# Altium PCB TK101_Tonegenerator_Hovedkort.PcbDoc
Units mm, origin at the board's own origin, x right, y up, seen from the top; angles counter-clockwise.
Board outline 70 x 50 mm, 2 copper layers (Top Layer, Bottom Layer); 54 components, 36 nets, 165 pads, 208 vias.
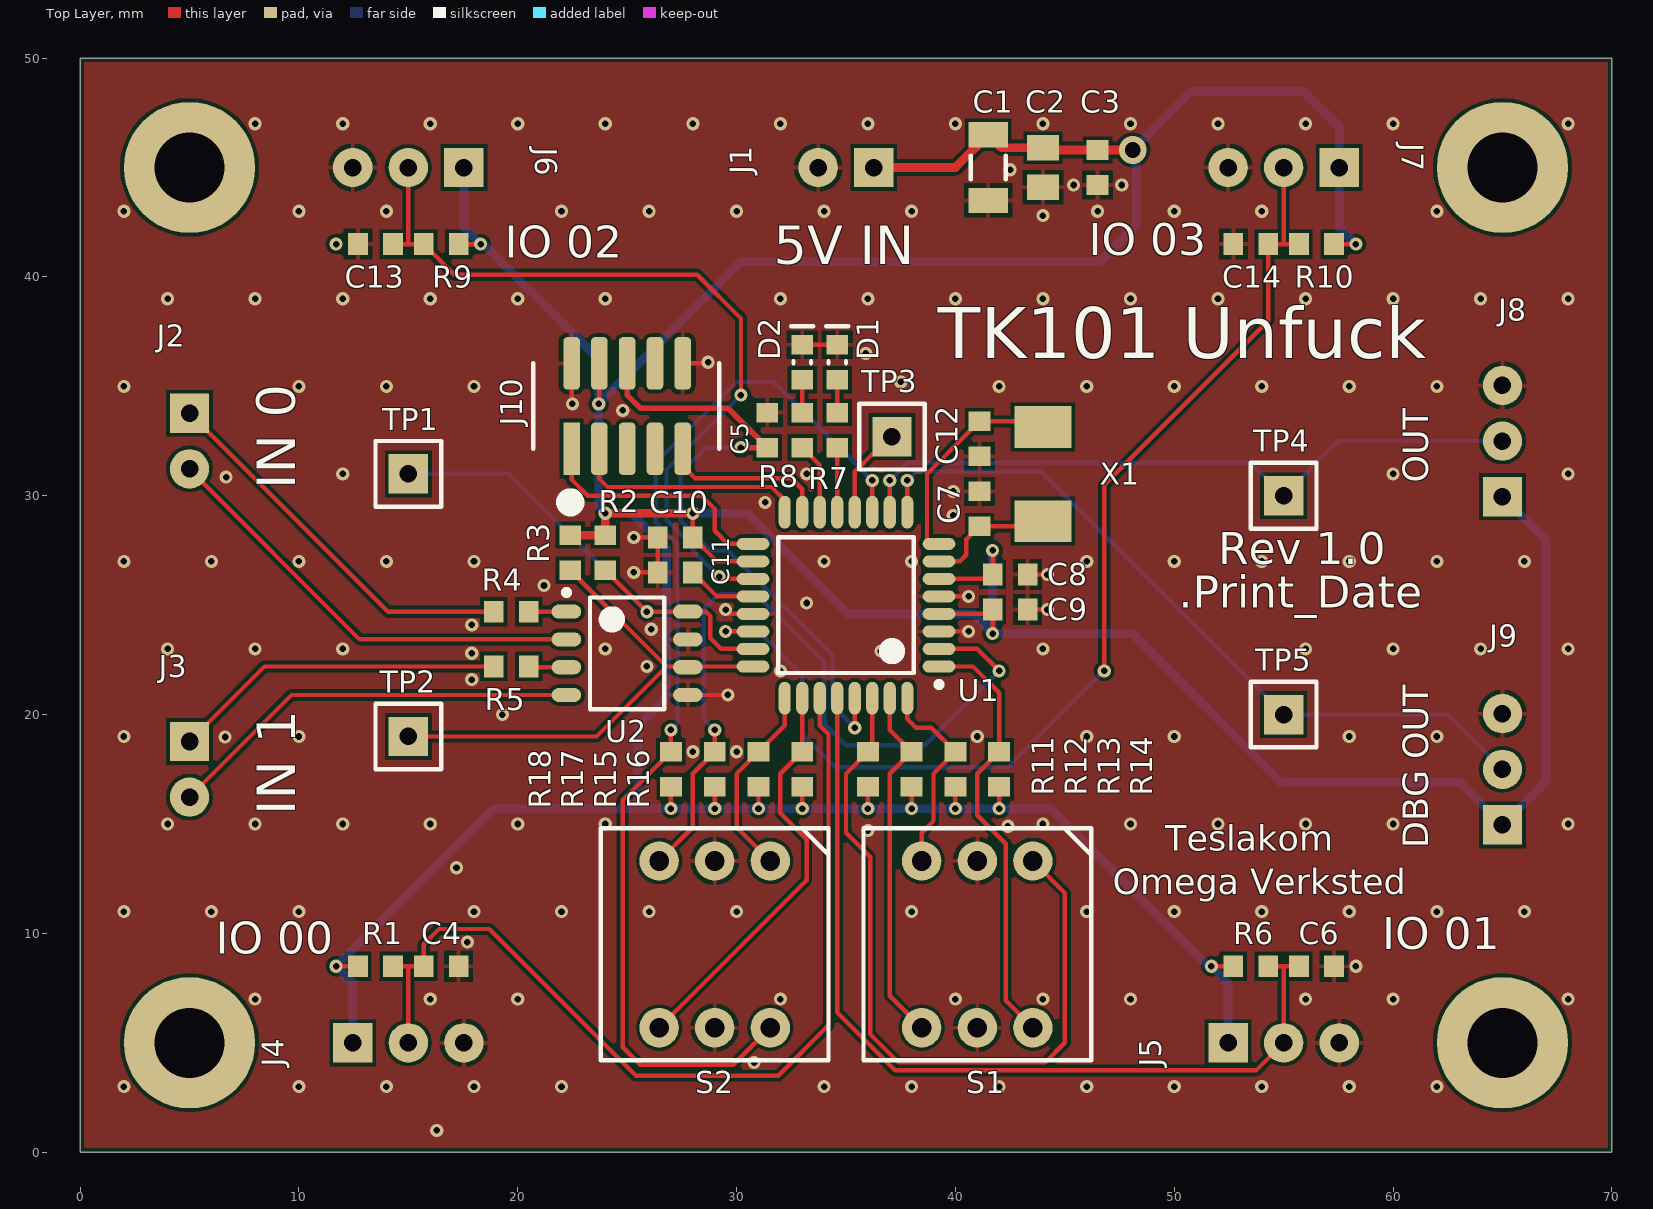
[diagram p0: Top Layer view]
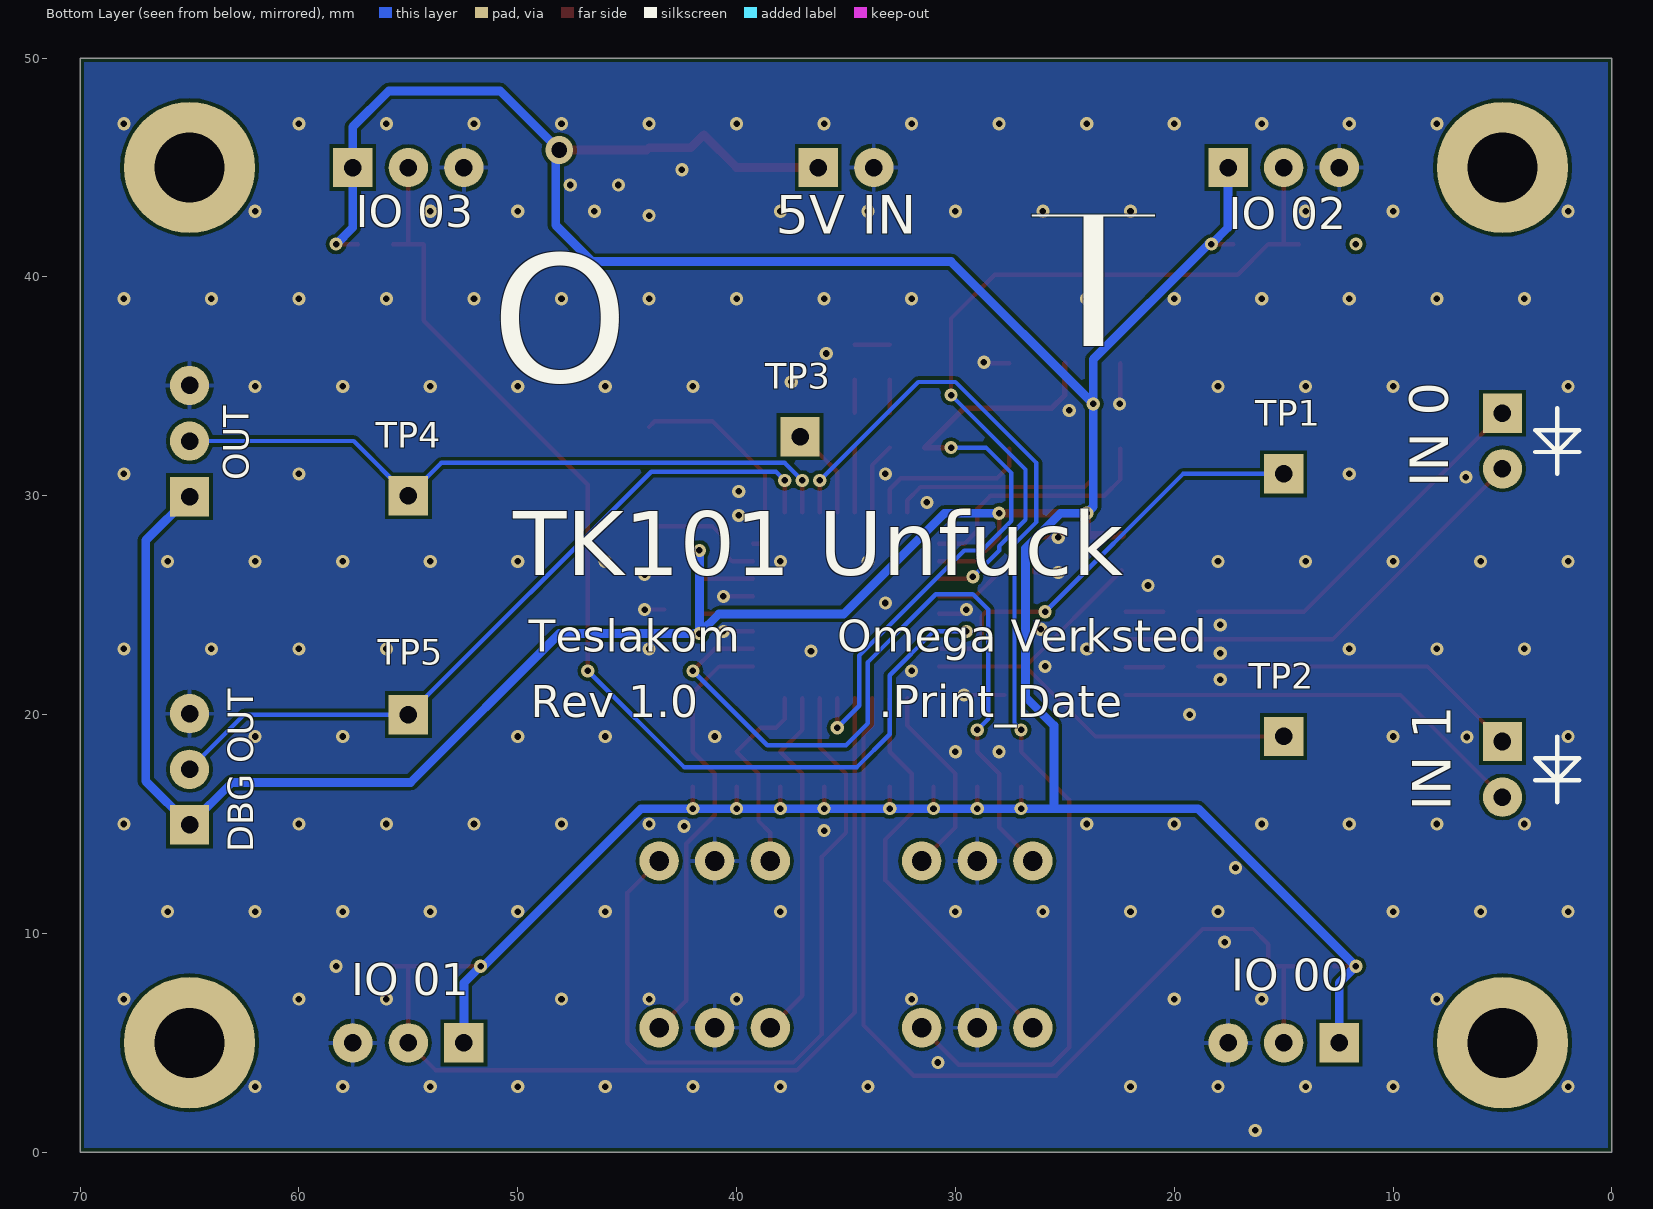
[diagram p1: Bottom Layer view, seen from below]

## Layer stack, top to bottom
Top Solder: solder mask 0.0102, Solder Resist, Dk 3.5
Top Layer: signal copper 0.0356
Dielectric 1: dielectric 0.32, FR-4, Dk 4.8
Bottom Layer: signal copper 0.0356
Bottom Solder: solder mask 0.0102, Solder Resist, Dk 3.5

## Board outline
0,0 0,50 70,50 70,0

## Design rules (kind name [scope] priority, off if disabled: settings)
Clearance [All] p1: gap=0.16 except(0: Arc-Text Track-Text SMDPad-Text THPad-Text Via-Text Fill-Text Poly-Text Region-Text Text-Text)
Height [All] p1: minheight=0 maxheight=200 prefheight=12.7
HoleSize [All] p1: absolutevalues=TRUE maxlimit=6.35 minlimit=0.3 maxpercent=80.000 minpercent=20.000
MinimumSolderMaskSliver [All] p1: minsoldermaskwidth=0.1
PlaneClearance [All] p1: clearance=1
PlaneConnect [All] p1: planeconnectstyle=Relief reliefexpansion=0.508 reliefentries=4 reliefconductorwidth=1 reliefairgap=0.254
PolygonConnect PolygonConnect_1 [IsVia] p1: connectstyle=Direct reliefconductorwidth=0.254 reliefentries=4 polygonreliefangle="90 Angle" airgapwidth=0.254
PolygonConnect [All] p2: connectstyle=Relief reliefconductorwidth=0.2 reliefentries=4 polygonreliefangle="90 Angle" airgapwidth=0.2
RoutingVias [All] p1: holewidth=0.3 width=0.6 viastyle="Through Hole" minholewidth=0.3 minwidth=0.6 maxholewidth=6.35 maxwidth=10
SilkToSolderMaskClearance [IsPad] p1: minsilkscreentomaskgap=0.178 clearancetoexposedcopper=TRUE
SolderMaskExpansion [All] p1: expansion=0.1
Width [All] p1: maxlimit=10 minlimit=0.16 preferedwidth=0.4
24 further rules are at their usual default settings.

## Components (designator, comment, footprint, x,y, rotation, side; value= is the part's Value field where it differs from the comment)
C1 "4.7uF" CAPC1206(3216)170_N 41.5,45 r90 top
C2 "1uF" CAPC0805(2012)100_N 44,45 r90 top
C3 "100nF" CAPC0603(1608)55_N 46.5,45 r90 top
C4 "100nF" CAPC0603(1608)55_N 16.5,8.5 r180 top
C5 "100nF" CAPC0603(1608)55_N 31.4,33 r270 top
C6 "100nF" CAPC0603(1608)55_N 56.5,8.5 r180 top
C7 "8.2pF" CAPC0603(1608)55_N 41.1,29.4 r270 top
C8 "100nF" CAPC0603(1608)55_N 42.5,26.4 r0 top
C9 "100nF" CAPC0603(1608)55_N 42.5,24.8 r0 top
C10 "100nF" CAPC0603(1608)55_N 27.2,28.1 r0 top
C11 "100nF" CAPC0603(1608)55_N 27.2,26.5 r0 top
C12 "8.2pF" CAPC0603(1608)55_N 41.1,32.6 r90 top
C13 "100nF" CAPC0603(1608)55_N 13.5,41.5 r0 top
C14 "100nF" CAPC0603(1608)55_N 53.5,41.5 r0 top
D1 "SMD LED Red" I_LEDC0603(1608)_N 34.6,36.1 r90 top
D2 "SMD LED Red" I_LEDC0603(1608)_N 33,36.1 r90 top
J1 "JST 2pin" JST_2P 35,45 r90 top
J2 "JST 2pin" JST_2P 5,32.5 r180 top
J3 "JST 2pin" JST_2P 5,17.5 r180 top
J4 "JST 3pin" JST_3P 15,5 r270 top
J5 "JST 3pin" JST_3P 55,5 r270 top
J6 "JST 3pin" JST_3P 15,45 r90 top
J7 "JST 3pin" JST_3P 55,45 r90 top
J8 "JST 3pin" JST_3P 65,32.5 r0 top
J9 "JST 3pin" JST_3P 65,17.5 r0 top
J10 "Header SMD 127 2x5" SMDHDRV10P127_2X5_615X330X560B 25,34.1 r90 top
R1 "10k" RESC0603(1608)_N 13.5,8.5 r180 top
R2 "10k" RESC0603(1608)_N 24,27.4 r90 top
R3 "10k" RESC0603(1608)_N 22.4,27.4 r90 top
R4 "330R" RESC0603(1608)_N 19.7,24.7 r0 top
R5 "330R" RESC0603(1608)_N 19.7,22.2 r0 top
R6 "10k" RESC0603(1608)_N 53.5,8.5 r180 top
R7 "330R" RESC0603(1608)_N 34.6,33 r270 top
R8 "330R" RESC0603(1608)_N 33,33 r270 top
R9 "10k" RESC0603(1608)_N 16.5,41.5 r0 top
R10 "10k" RESC0603(1608)_N 56.5,41.5 r0 top
R11 "10k" RESC0603(1608)_N 36,17.5 r270 top
R12 "10k" RESC0603(1608)_N 38,17.5 r270 top
R13 "10k" RESC0603(1608)_N 40,17.5 r270 top
R14 "10k" RESC0603(1608)_N 42,17.5 r270 top
R15 "10k" RESC0603(1608)_N 31,17.5 r270 top
R16 "10k" RESC0603(1608)_N 33,17.5 r270 top
R17 "10k" RESC0603(1608)_N 29,17.5 r270 top
R18 "10k" RESC0603(1608)_N 27,17.5 r270 top
S1 "MCRS3AF-16R-V-B" MCRS3AF-16R-V-B 41,9.5 r180 top
S2 "MCRS3AF-16R-V-B" MCRS3AF-16R-V-B 29,9.5 r180 top
TP1 "Header1x1" HDRV1W64P254_1X1_254X254X900B 15,31 r0 top
TP2 "Header1x1" HDRV1W64P254_1X1_254X254X900B 15,19 r0 top
TP3 "Header1x1" HDRV1W64P254_1X1_254X254X900B 37.1,32.7 r0 top
TP4 "Header1x1" HDRV1W64P254_1X1_254X254X900B 55,30 r0 top
TP5 "Header1x1" HDRV1W64P254_1X1_254X254X900B 55,20 r0 top
U1 "ATMEGA168V-10AI" TQFP80P900X900X120-32N 35,25 r180 top
U2 "Dual_Optocoupler" SOIC127P590X363-8N 25,22.8 r0 top
X1 "NX5032GA-16" CRYSTAL-ABM7 44,31 r90 top

## Footprints (in the part's own frame and the unit in brackets; to place one, negate y for a bottom-side part, rotate by r counter-clockwise, add the part's x,y. Pads: shape width x height; smd on the part's side, far side on the other; paste and mask are expansions set on the pad)
CAPC0603(1608)55_N [mm] "Chip Capacitor, Body 1.6x0.8mm, Height 0.55mm, IPC Medium Density"
  rect 0.9x1 smd: 1(-0.8,0) 2(0.8,0)
  body extent -0.87,-0.48 0.88,0.47, height 0.55
CAPC0805(2012)100_N [mm] "Chip Capacitor, Body 2.0x1.2mm, Height 1.0mm, IPC Medium Density"
  rect 1.15x1.45 smd: 1(-0.9,0) 2(0.9,0)
  body extent -1.1,-0.72 1.1,0.73, height 1
CAPC1206(3216)170_N [mm] "Chip Capacitor, Body 3.2x1.6mm, Height 1.7mm, IPC Medium Density"
  rect 1.15x1.8 smd: 1(-1.5,0) 2(1.5,0)
  silkscreen extent -0.55,-0.8 0.55,0.8, body extent -1.7,-0.9 1.7,0.9, height 1.7
CRYSTAL-ABM7 [mm]
  rect 1.9x2.6 smd: 1(-2.159,0) 2(2.141,0)
  body extent -3.05,-1.75 3.05,1.75, height 1.44
HDRV1W64P254_1X1_254X254X900B [mm] "Header 1x1"
  rect 1.8x1.8 hole 0.8: 1(0,0)
  silkscreen extent -1.5,-1.5 1.5,1.5
I_LEDC0603(1608)_N [mm] "Chip Resistor, Body 1.6x0.8mm, IPC Medium Density"
  rect 0.9x1 smd: 1(-0.8,0) 2(0.8,0)
  silkscreen extent -0.05,-0.51 1.65,0.51, body extent -0.85,-0.45 0.85,0.45, height 0.9
JST_2P [mm]
  rect 1.8x1.8 hole 0.8: 1(0,-1.27)
  round 1.8 hole 0.8: 2(0,1.27)
  body extent -2.4,-3.7 3.35,3.7, height 7
JST_3P [mm]
  rect 1.8x1.8 hole 0.8: 1(0,-2.54)
  round 1.8 hole 0.8: 2(0,0) 3(0,2.54)
  body extent -2.35,-4.95 3.4,4.95, height 7
MCRS3AF-16R-V-B [mm] "Rotary hex encoder"
  round 1.8 hole 0.9: 1(-2.54,-3.81) 2(2.54,3.81) 4(2.54,-3.81) 8(-2.54,3.81) C(0,3.81) C(0,-3.81)
  silkscreen extent -5.2,-5.3 5.2,5.3, body extent -4.9,-4.95 4.9,4.95, height 4.5
RESC0603(1608)_N [mm] "Chip Resistor, Body 1.6x0.8mm, IPC Medium Density"
  rect 0.9x1 smd: 1(-0.8,0) 2(0.8,0)
  body extent -0.85,-0.47 0.85,0.47, height 0.6
SMDHDRV10P127_2X5_615X330X560B [mm] "SMD 2X5 Vertical Header"
  rect 2.4x0.76 smd: 1(-1.95,2.54)
  rrect50% 2.4x0.76 smd: 2(1.95,2.54) 3(-1.95,1.27) 4(1.95,1.27) 5(-1.95,0) 6(1.95,0) 7(-1.95,-1.27) 8(1.95,-1.27) 9(-1.95,-2.54) 10(1.95,-2.54)
  silkscreen extent -4.54,-4.21 1.95,4.29, body extent -2.7,-3.18 2.8,3.17, height 4.5
SOIC127P590X363-8N [mm] "SOIC, 8-Leads, Body 4,88x3,91mm, Pitch 1,27mm, IPC Medium Density"
  oval 1.35x0.65 smd: 1(-2.775,1.905) 2(-2.775,0.635) 3(-2.775,-0.635) 4(-2.775,-1.905) 5(2.775,-1.905) 6(2.775,-0.635) 7(2.775,0.635) 8(2.775,1.905)
  silkscreen extent -2.9,-2.55 1.7,2.9, body extent -3.1,-2.5 3.1,2.5, height 1.75
TQFP80P900X900X120-32N [mm] "TQFP, 32-Leads, Body 7,00x7,00mm, Pitch 0,80mm, IPC Medium Density"
  oval 1.5x0.55 smd mask+0.13: 1(-4.25,2.8) 2(-4.25,2) 3(-4.25,1.2) 4(-4.25,0.4) 5(-4.25,-0.4) 6(-4.25,-1.2) 7(-4.25,-2) 8(-4.25,-2.8) 17(4.25,-2.8) 18(4.25,-2) 19(4.25,-1.2) 20(4.25,-0.4) 21(4.25,0.4) 22(4.25,1.2) 23(4.25,2) 24(4.25,2.8)
  oval 0.55x1.5 smd mask+0.13: 9(-2.8,-4.25) 10(-2,-4.25) 11(-1.2,-4.25) 12(-0.4,-4.25) 13(0.4,-4.25) 14(1.2,-4.25) 15(2,-4.25) 16(2.8,-4.25) 25(2.8,4.25) 26(2,4.25) 27(1.2,4.25) 28(0.4,4.25) 29(-0.4,4.25) 30(-1.2,4.25) 31(-2,4.25) 32(-2.8,4.25)
  silkscreen extent -4.38,-3.1 3.1,3.75, body extent -4.51,-4.51 4.51,4.51, height 1.1

## Part data
C1: library part 2992, "X7R 50V"
C2: library part 3582, "X7R 50V 10%"
C3 C4 C5 C6 C8 C9 C10 C11 C13 C14: library part 3028, "X7R 50V 5%"
C7 C12: library part 3032, "NP0 50V 5%"
D1 D2: library part 2209
J1 J2 J3: library part 2227, "pris pr. stk."
J4 J5 J6 J7 J8 J9: library part 2226, "pris pr. stk."
J10: library part 2449, "1,27mm Pitch SMD Header"
R1 R2 R3 R6 R9 R10 R11 R12 R13 R14 R15 R16 R17 R18: library part 2444, "0.1W 1% Thick film resistor"
R4 R5 R7 R8: library part 2448, "0.1W 1% Thick film resistor"
S1 S2: library part 3765, "Rotary hex switch"
TP1 TP2 TP3 TP4 TP5: library part 2428
U1: library part 2242
U2: library part 2379, "Dual Optocoupler"
X1: library part 1594, "Crystal 16 MHz"

## Free pads (board coordinates)
  round 6 hole 3.2: 0(5,5) 0(5,45) 0(65,5) 0(65,45)

## Via types
v1: diameter 0.6, hole 0.3, Top Layer to Bottom Layer, tented both sides, 205 vias
v2: diameter 0.6, hole 0.3, Top Layer to Bottom Layer, 2 vias
v3: diameter 1.27, hole 0.711, Top Layer to Bottom Layer, tented both sides, 1 vias

## Nets (pads, with @x,y where several pads share a name; then routed paths per layer and width w, separated by ;. In a path a pad name is that pad's centre, name@x,y a point inside that pad or via, vN(x,y) a via of type N, cw(c..) or ccw(c..) an arc to the next point about the centre after c; other vN are vias at no path point)
AIN0: C4.2 J4.2 R1.1 U1.27 | length 43.5
  Top Layer w0.2: R1.1 15,8.5 ; J4.2 15,8.5 ; U1.27 33.8,19.5 34.2,19.1 34.2,5.8 31.9,3.5 25.4,3.5 18.7,10.2 16.4,10.2 15.7,9.5 C4.2 15,8.5
AIN1: C6.2 J5.2 R6.1 U1.28 | length 41.3
  Top Layer w0.2: U1.28 34.6,6.4 34.591,6.4 37.251,3.74 53.74,3.74 J5.2 55,8.5 ; R6.1 55,8.5 ; C6.2 55,8.5
AIN2: C13.2 J6.2 R9.1 U1.19 | length 36.6
  Top Layer w0.2: C13.2 15,41.5 ; J6.2 15,41.5 ; v1(29.2,26.3) 29.3,26.2 U1.19 ; v1(30.2,34.6) 30.2,38.1 28.2,40.1 17.1,40.1 R9.1 15,41.5
  Bottom Layer w0.2: v1(29.2,26.3) 28,27.5 28,27.7 26.8,28.9 26.8,31.2 v1(30.2,34.6)
AIN3: C14.2 J7.2 R10.1 U1.22 | length 52
  Top Layer w0.2: v1(29.5,23.8) U1.22 ; v1(46.8,22) 46.8,30.5 54.3,38 C14.2 55,41.5 ; J7.2 55,41.5 ; R10.1 55,41.5
  Bottom Layer w0.2: v1(29.5,23.8) 31,23.8 33,21.8 33,19.1 34.5,17.6 42.4,17.6 v1(46.8,22)
GND: C1.1 C2.1 C3.1 C4.1 C5.1 C6.1 C7.1 C8.2 C9.2 C10.1 C11.1 C12.1 C13.1 C14.1 D1.2 D2.2 J1.2 J4.3 J5.3 J6.3 J7.3 J8.3 J9.3 J10.2 J10.10 S1.C S2.C U1.3 U1.5 U1.21 U2.5 U2.7 | length 16.3
  Top Layer w0.2: J10.2 22.46,34.24 v1(22.5,34.2) ; v1(25.3,26.5) C11.1 C10.1 v1(25.3,28.1) ; J10.10 28.65,36.05 v1(28.7,36.1) ; U2.5 29.595,20.895 v1(29.6,20.9) ; v1(29.5,24.8) 29.4,24.8 29.6,24.6 U1.21 ; D2.2 D1.2 ; U1.3 v1(40.6,23.8) ; U1.5 v1(40.6,25.4) ; C9.2 v1(44.2,24.8) ; C8.2 v1(44.2,26.4)
  other v1: 16.3,1 2,3 10,3 14,3 18,3 22,3 34,3 38,3 42,3 46,3 50,3 54,3 58,3 62,3 30.8,4.1 8,7 16,7 20,7 32,7 40,7 44,7 48,7 56,7 60,7 68,7 58.3,8.5 17.7,9.6 2,11 6,11 10,11 18,11 22,11 26,11 30,11 38,11 46,11 50,11 54,11 58,11 62,11 66,11 17.2,13 36,14.7 42.4,14.9 4,15 8,15 12,15 16,15 20,15 24,15 44,15 48,15 52,15 56,15 60,15 68,15 28,18.3 30,18.3 2,19 10,19 41,19 46,19 50,19 58,19 62,19 19.3,20 17.9,21.6 32,22 25.9,22.2 17.9,22.8 36.6,22.9 4,23 8,23 12,23 24,23 44,23 56,23 60,23 64,23 68,23 26.1,23.9 17.9,24.1 33.2,25.1 21.2,25.9 2,27 6,27 10,27 14,27 18,27 34,27 38,27 46,27 50,27 54,27 58,27 62,27 66,27 39.9,29.1 31.3,29.7 39.9,30.2 12,31 33.2,31 60,31 68,31 24.8,33.9 2,35 10,35 14,35 18,35 42,35 46,35 50,35 54,35 58,35 62,35 37.5,35.2 35.9,36.5 4,39 8,39 12,39 16,39 20,39 24,39 32,39 36,39 40,39 44,39 48,39 52,39 56,39 60,39 64,39 68,39 44,42.8 2,43 10,43 14,43 22,43 26,43 30,43 34,43 38,43 46.5,43 50,43 54,43 62,43 45.4,44.2 47.6,44.2 42.5,44.9 8,47 12,47 16,47 20,47 24,47 28,47 32,47 36,47 40,47 44,47 48,47 52,47 56,47 60,47 68,47
  other v2: 6.625,18.975 6.675,30.85
HEX0_0: R11.1 S1.1 U1.30 | length 35
  Top Layer w0.2: U1.30 36.2,19.5 36.2,18.5 R11.1 35,17.3 35,14.6 36.1,13.5 36.1,5.4 37.4,4.1 44.1,4.1 45,5 45,11.85 S1.1
HEX0_1: R12.1 S1.2 U1.31 | length 16.5
  Top Layer w0.2: U1.31 37,19.3 R12.1 37,17.3 37,7.15 S1.2
HEX0_2: R13.1 S1.4 U1.32 | length 9.4
  Top Layer w0.2: U1.32 37.8,19.8 38.2,19.4 38.9,19.4 R13.1 39,17.3 39,15.14 38.46,14.6 S1.4
HEX0_3: R14.1 S1.8 U1.1 | length 20
  Top Layer w0.2: U1.1 40.8,22.2 42,21 R14.1 41,17.3 41,15.4 42.3,14.1 42.3,6.93 S1.8
HEX1_0: R15.1 S2.1 U1.25 | length 9
  Top Layer w0.2: S2.1 30,14.85 30,17.3 R15.1 32.2,19.5 U1.25
HEX1_1: R16.1 S2.2 U1.26 | length 18.8
  Top Layer w0.2: S2.2 33.2,12.43 33.2,14.3 32,15.5 32,17.3 R16.1 U1.26
HEX1_2: R17.1 S2.4 U1.2 | length 35.6
  Top Layer w0.2: S2.4 28,14.85 28,17.3 R17.1 v1(29,19.3) ; U1.2 41,23 v1(42,22)
  Bottom Layer w0.2: v1(29,19.3) 28.5,19.8 28.5,24.8 29.2,25.5 30.9,25.5 34,22.4 34,19.6 35,18.6 38.6,18.6 v1(42,22)
HEX1_3: R18.1 S2.8 U1.11 | length 50.7
  Top Layer w0.2: v1(27,19.3) R18.1 24.8,16.1 24.8,4.8 25.6,4 29.85,4 S2.8 ; U1.11 v1(36.2,30.7)
  Bottom Layer w0.2: v1(27,19.3) 27.3,19.6 27.3,27.8 26.3,28.8 26.3,31.5 30,35.2 31.7,35.2 v1(36.2,30.7)
IN0: R2.1 TP1.1 U1.23 U2.8 | length 22.3
  Top Layer w0.2: R2.1 v1@25.895,24.705 ; v1@25.9,24.705 U2.8 28.595,24.705 28.8,24.5 28.8,23.5 29.3,23 U1.23
  Bottom Layer w0.2: TP1.1 19.6,31 v1(25.9,24.7)
IN1: R3.1 TP2.1 U1.24 U2.6 | length 22.8
  Top Layer w0.2: TP2.1@15.5,19 23.6,19 26.8,22.2 ; R3.1 26.8,22.2 ; U1.24 26.8,22.2
LED0: R7.2 U1.13 | length 3
  Top Layer w0.2: U1.13 R7.2
LED1: R8.2 U1.14 | length 3.3
  Top Layer w0.2: R8.2 33.8,31.4 U1.14
NetC11_2: C11.2 U1.20 | length 3.2
  Top Layer w0.2: C11.2 29.1,25.4 U1.20
NetD1_1: D1.1 R7.1 | length 1.5
  Top Layer w0.2: R7.1 D1.1
NetD2_1: D2.1 R8.1 | length 1.5
  Top Layer w0.2: R8.1 D2.1
NetJ2_1: J2.1 R4.1 | length 17.7
  Top Layer w0.2: J2.1 14.07,24.7 R4.1
NetJ2_2: J2.2 U2.2 | length 20.5
  Top Layer w0.2: J2.2 5,31.208 12.773,23.435 U2.2
NetJ3_1: J3.1 R5.1 | length 15.3
  Top Layer w0.2: J3.1 8.43,22.2 R5.1
NetJ3_2: J3.2 U2.4 | length 19.2
  Top Layer w0.2: J3.2 9.665,20.895 U2.4
NetR4_2: R4.2 U2.1 | length 1.7
  Top Layer w0.2: R4.2 20.505,24.705 U2.1
NetR5_2: R5.2 U2.3 | length 1.7
  Top Layer w0.2: R5.2 20.535,22.165 U2.3
OPTIKK_UT: J8.2 TP4.1 U1.10 | length 31.4
  Top Layer w0.2: U1.10 v1(37,30.7)
  Bottom Layer w0.2: v1(37,30.7) 37.8,31.5 53.5,31.5 TP4.1 57.5,32.5 J8.2
OPTIKK_UT_DEBUG: J9.2 TP5.1 U1.9 | length 34.4
  Top Layer w0.2: U1.9 v1(37.8,30.7)
  Bottom Layer w0.2: v1(37.8,30.7) 38.2,31.1 43.9,31.1 TP5.1 62.5,20 J9.2
PB0_CLKO: TP3.1 U1.12 | length 3.8
  Top Layer w0.2: U1.12 35.4,31.1 36.3,32 TP3.1@37,32
PB3_MOSI: J10.9 U1.15 | length 7.7
  Top Layer w0.2: J10.9 27.54,31.36 28.1,30.8 32.5,30.8 33,30.3 U1.15
PB4_MISO: J10.3 U1.16 | length 10.8
  Top Layer w0.2: J10.3 23.73,30.77 24.1,30.4 31.6,30.4 32.2,29.8 U1.16
PB4_SCK: J10.1 U1.17 | length 11.5
  Top Layer w0.2: J10.1 22.46,30.74 23.2,30 28.4,30 29,29.4 29,28.4 29.6,27.8 U1.17
RESET: C5.2 J10.6 U1.29 | length 30
  Top Layer w0.2: v1(35.4,19.4) U1.29
  Top Layer w0.254: J10.6 25,34.6 25.6,34 29.6,34 C5.2 v1(30.2,32.2)
  Bottom Layer w0.2: v1(30.2,32.2) 28.6,32.2 27.44,31.04 27.44,28.86 28.8,27.5 29.6,27.5 34.4,22.7 34.4,20.4 v1(35.4,19.4)
VCC_P5V0: C1.2 C2.2 C3.2 C8.1 C9.1 C10.2 J1.1 J4.1 J5.1 J6.1 J7.1 J8.1 J9.1 J10.4 R1.2 R2.2 R3.2 R6.2 R9.2 R10.2 R11.2 R12.2 R13.2 R14.2 R15.2 R16.2 R17.2 R18.2 U1.4 U1.6 U1.18 | length 244.5
  Top Layer w0.2: v1(11.7,8.5) R1.2 ; R9.2 v1(18.3,41.5) ; v1(23.7,34.2) 23.73,34.23 J10.4 ; v1(27,15.7) R18.2 ; v1(28,29.2) C10.2 29.1,27 U1.18 ; v1(29,15.7) R17.2 ; v1(31,15.7) R15.2 ; v1(33,15.7) R16.2 ; v1(36,15.7) R11.2 ; v1(38,15.7) R12.2 ; U1.4 41.5,24.6 C9.1 v1(41.7,23.7) ; U1.6 41.5,26.2 C8.1 v1(41.7,27.5) ; v1(40,15.7) R13.2 ; v1(42,15.7) R14.2 ; v1(51.7,8.5) R6.2 ; R10.2 v1(58.3,41.5)
  Top Layer w0.4: R3.2 R2.2 v1(24,29.2) v1(28,29.2) ; J1.1 40,45 C1.2 42.1,45.9 C2.2 44.1,45.8 C3.2 v3(48.1,45.8)
  Bottom Layer w0.4: J4.1 12.46,7.74 v1(11.7,8.5) 18.9,15.7 25.5,15.7 ; J6.1 17.54,42.26 v1(18.3,41.5) 18.433,41.5 23.7,36.233 v1(23.7,34.2) ; v1(28,29.2) 30.5,29.2 35.1,24.6 40.8,24.6 v1(41.7,23.7) ; v1(41.7,27.5) v1(41.7,23.7) ; J5.1 52.46,7.74 v1(51.7,8.5) 51.567,8.5 44.367,15.7 v1(42,15.7) v1(40,15.7) v1(38,15.7) v1(36,15.7) v1(33,15.7) v1(31,15.7) v1(29,15.7) v1(27,15.7) 25.5,15.7 ; v1(58.3,41.5) 57.54,42.26 J7.1 57.54,46.86 55.9,48.5 50.8,48.5 v3(48.1,45.8) 48.26,45.64 48.26,42.36 46.6,40.7 30.2,40.7 v1(23.7,34.2) ; J8.1 67,27.96 67,16.96 J9.1 63.06,16.9 54.9,16.9 48.1,23.7 v1(41.7,23.7) ; v1(23.7,34.2) 23.7,29.5 v1(24,29.2) 25.2,29.2 26.8,27.6 26.8,20.8 25.5,19.5 25.5,15.7
XTAL1: C7.2 U1.7 X1.1 | length 5.9
  Top Layer w0.2: U1.7 40.2,27 40.5,27.3 40.5,28 C7.2 43.759,28.6 X1.1
XTAL2: C12.2 U1.8 X1.2 | length 10.2
  Top Layer w0.2: U1.8 38.7,27.8 38.7,31 40.6,32.9 C12.2 43.741,33.4 X1.2
pads on no net: J10.5 J10.7 J10.8
copper on no net:
  other v1: 11.7,41.5

## Polygon pours and split planes (outlines as drawn)
GND on Top Layer "GND" (solid, pour order 0): 0.2,0.2 0.2,49.8 69.8,49.8 69.8,0.2
GND on Bottom Layer "GND" (solid, pour order 2): 0.2,0.2 0.2,49.8 69.8,49.8 69.8,0.2

## Silkscreen, mask and mechanical layers (free items; w line width, h text height)
Top Overlay:
  text "IO 03" at 46.1,40.5 h2.5
  text "IO 02" at 19.4,40.4 h2.5
  text "5V IN" at 31.7,40 h3
  text "TK101 Unfuck" at 39.2,35.5 h4
  text "OUT" at 62,30.6 h2 r90
  text "IN 0" at 10.4,30.3 h3 r90
  text "Rev 1.0" at 52,26.4 h2.5
  text ".Print_Date" at 50.2,24.4 h2.5
  text "IN 1" at 10.4,15.4 h3 r90
  text "DBG OUT" at 62,13.9 h2 r90
  text "Teslakom" at 49.6,13.4 h2
  text "Omega Verksted" at 47.2,11.4 h2
  text "IO 01" at 59.5,8.8 h2.5
  text "IO 00" at 6.2,8.6 h2.5
Bottom Overlay:
  lines w0.1: 2.5,17.5 2.5,17.5 ; 2.5,32.5 2.5,32.5
  lines w0.2: 1.5,17 3.5,17 ; 1.5,32 3.5,32 ; 2.5,16 2.5,19 ; 2.5,31 2.5,34 ; 2.5,17 3.5,18 1.5,18 2.5,17 ; 2.5,17 2.5,17 ; 2.5,32 1.5,33 3.5,33 2.5,32 ; 2.5,32 2.5,32
  text "IO 03" at 57.4,41.8 h2.5
  text "IO 02" at 17.5,41.7 h2.5
  text "5V IN" at 38.2,41.4 h3
  text "TP3" at 38.7,34.5 h2
  text "T" at 20.9,34 h15
  text "O" at 51.2,33.3 h10
  text "TP1" at 16.3,32.8 h2
  text "TP4" at 56.5,31.8 h2
  text "OUT" at 61.9,30.7 h2 r270
  text "IN 0" at 6.9,30.4 h3 r270
  text "TK101 Unfuck" at 50.2,25.4 h5
  text "Omega Verksted" at 35.4,22.4 h2.5
  text "Teslakom" at 49.5,22.4 h2.5
  text "TP5" at 56.4,21.9 h2
  text "TP2" at 16.6,20.8 h2
  text ".Print_Date" at 33.5,19.4 h2.5
  text "Rev 1.0" at 49.4,19.4 h2.5
  text "IN 1" at 6.8,15.6 h3 r270
  text "DBG OUT" at 61.7,13.7 h2 r270
  text "IO 00" at 17.4,6.9 h2.5
  text "IO 01" at 57.6,6.7 h2.5
Mechanical 1:
  the board outline again, w0.1

## Text inside footprints (layer, text, board x,y; h text height)
S1: Mechanical 13 "0" at 40.765,11.888 h0.8; Mechanical 13 "1" at 41.697,11.797 h0.8 r337.5; Mechanical 13 "2" at 42.523,11.355 h0.8 r315; Mechanical 13 "3" at 43.117,10.631 h0.8 r292.5; Mechanical 13 "4" at 43.388,9.735 h0.8 r270; Mechanical 13 "6" at 42.855,7.977 h0.8 r225; Mechanical 13 "7" at 42.131,7.383 h0.8 r202.5; Mechanical 13 "8" at 41.235,7.112 h0.8 r180; Mechanical 13 "5" at 43.297,8.803 h0.8 r247.5; Mechanical 13 "9" at 40.303,7.203 h0.8 r157.5; Mechanical 13 "A" at 39.477,7.645 h0.8 r135; Mechanical 13 "B" at 38.883,8.369 h0.8 r112.5; Mechanical 13 "C" at 38.612,9.265 h0.8 r90; Mechanical 13 "D" at 38.703,10.197 h0.8 r67.5; Mechanical 13 "E" at 39.145,11.023 h0.8 r45; Mechanical 13 "F" at 39.869,11.617 h0.8 r22.5
S2: Mechanical 13 "0" at 28.765,11.888 h0.8; Mechanical 13 "1" at 29.697,11.797 h0.8 r337.5; Mechanical 13 "2" at 30.523,11.355 h0.8 r315; Mechanical 13 "3" at 31.117,10.631 h0.8 r292.5; Mechanical 13 "4" at 31.388,9.735 h0.8 r270; Mechanical 13 "6" at 30.855,7.977 h0.8 r225; Mechanical 13 "7" at 30.131,7.383 h0.8 r202.5; Mechanical 13 "8" at 29.235,7.112 h0.8 r180; Mechanical 13 "5" at 31.297,8.803 h0.8 r247.5; Mechanical 13 "9" at 28.303,7.203 h0.8 r157.5; Mechanical 13 "A" at 27.477,7.645 h0.8 r135; Mechanical 13 "B" at 26.883,8.369 h0.8 r112.5; Mechanical 13 "C" at 26.612,9.265 h0.8 r90; Mechanical 13 "D" at 26.703,10.197 h0.8 r67.5; Mechanical 13 "E" at 27.145,11.023 h0.8 r45; Mechanical 13 "F" at 27.869,11.617 h0.8 r22.5